# Altium PCB New_Bottom_Board.PcbDoc (part 1 of 2)
Units mm, origin at the board's own origin, x right, y up, seen from the top; angles counter-clockwise.
Board outline 85 x 66 mm, 2 copper layers (Top Layer, Bottom Layer); 47 components, 65 nets, 232 pads, 144 vias.
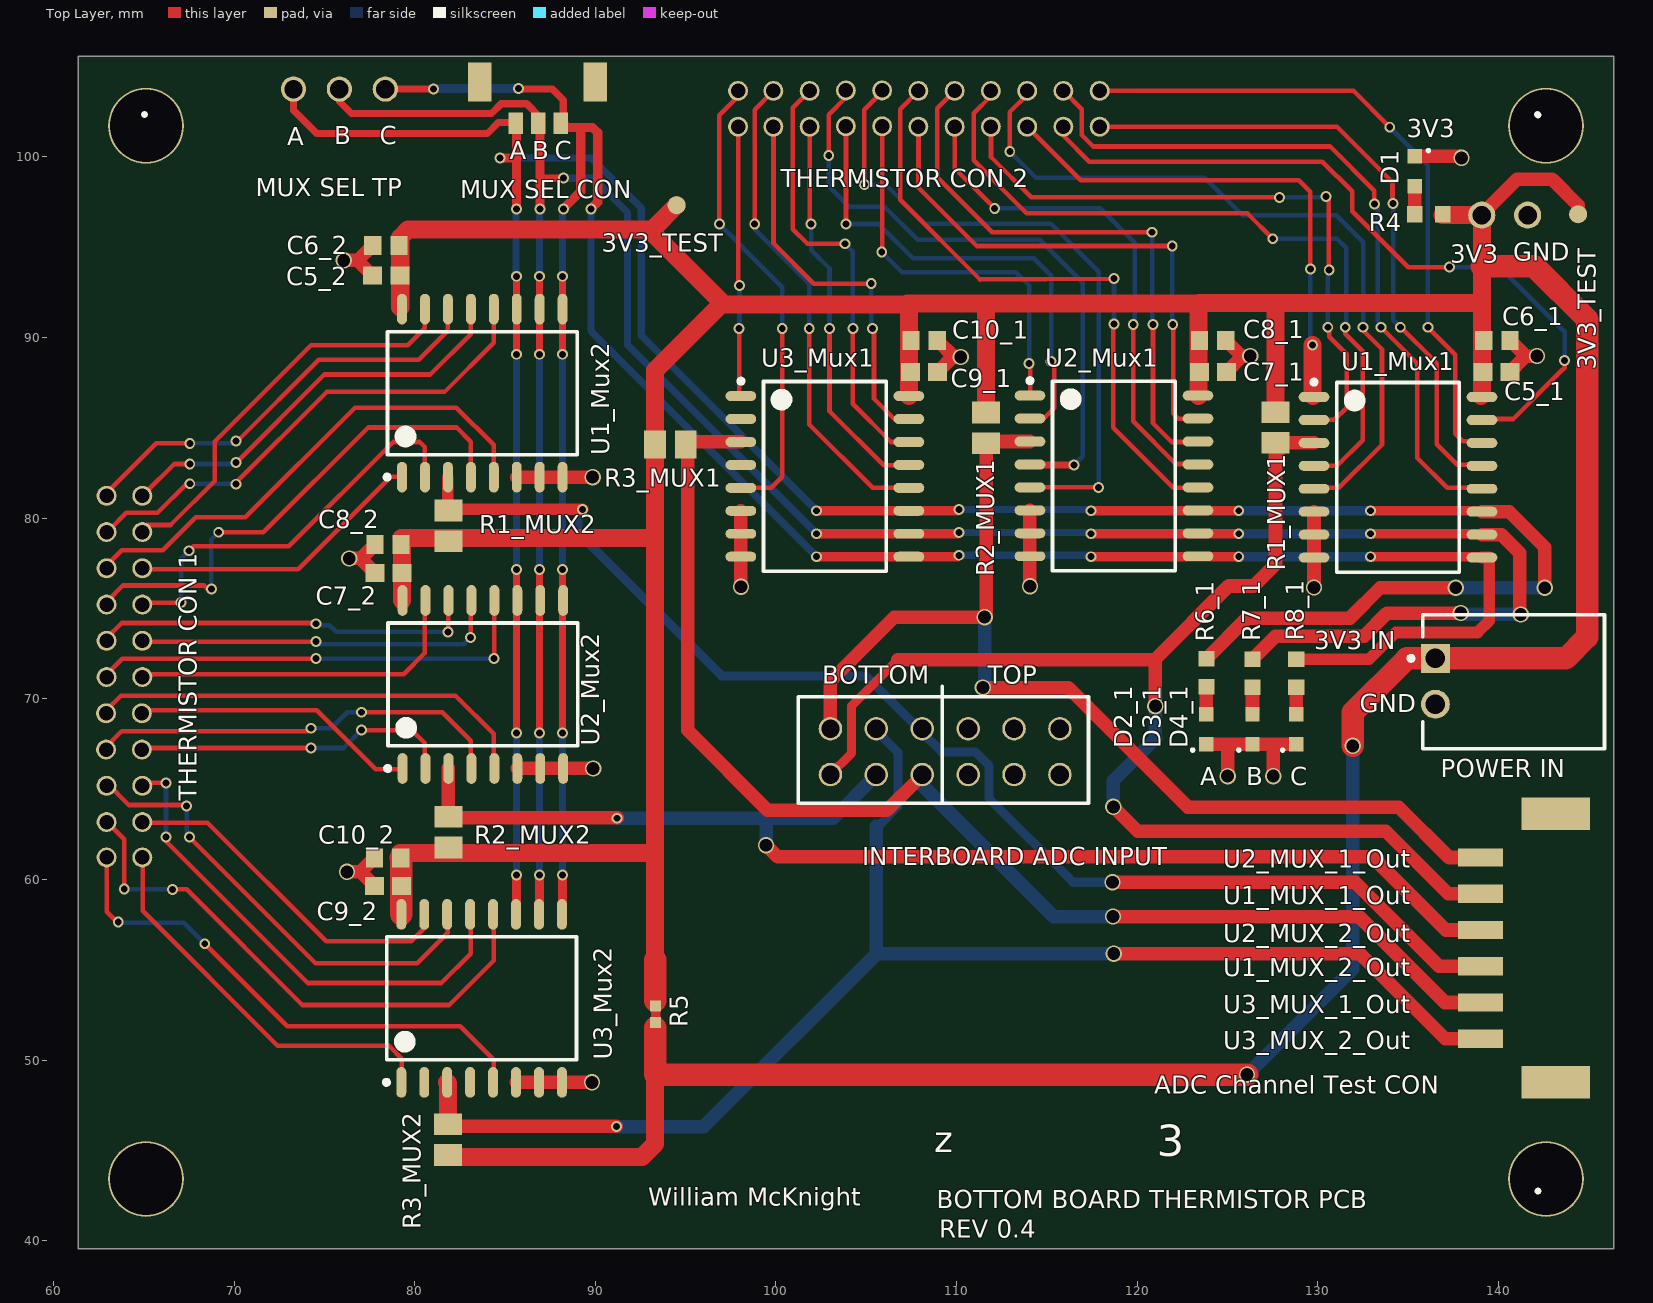
[diagram p0: Top Layer view]
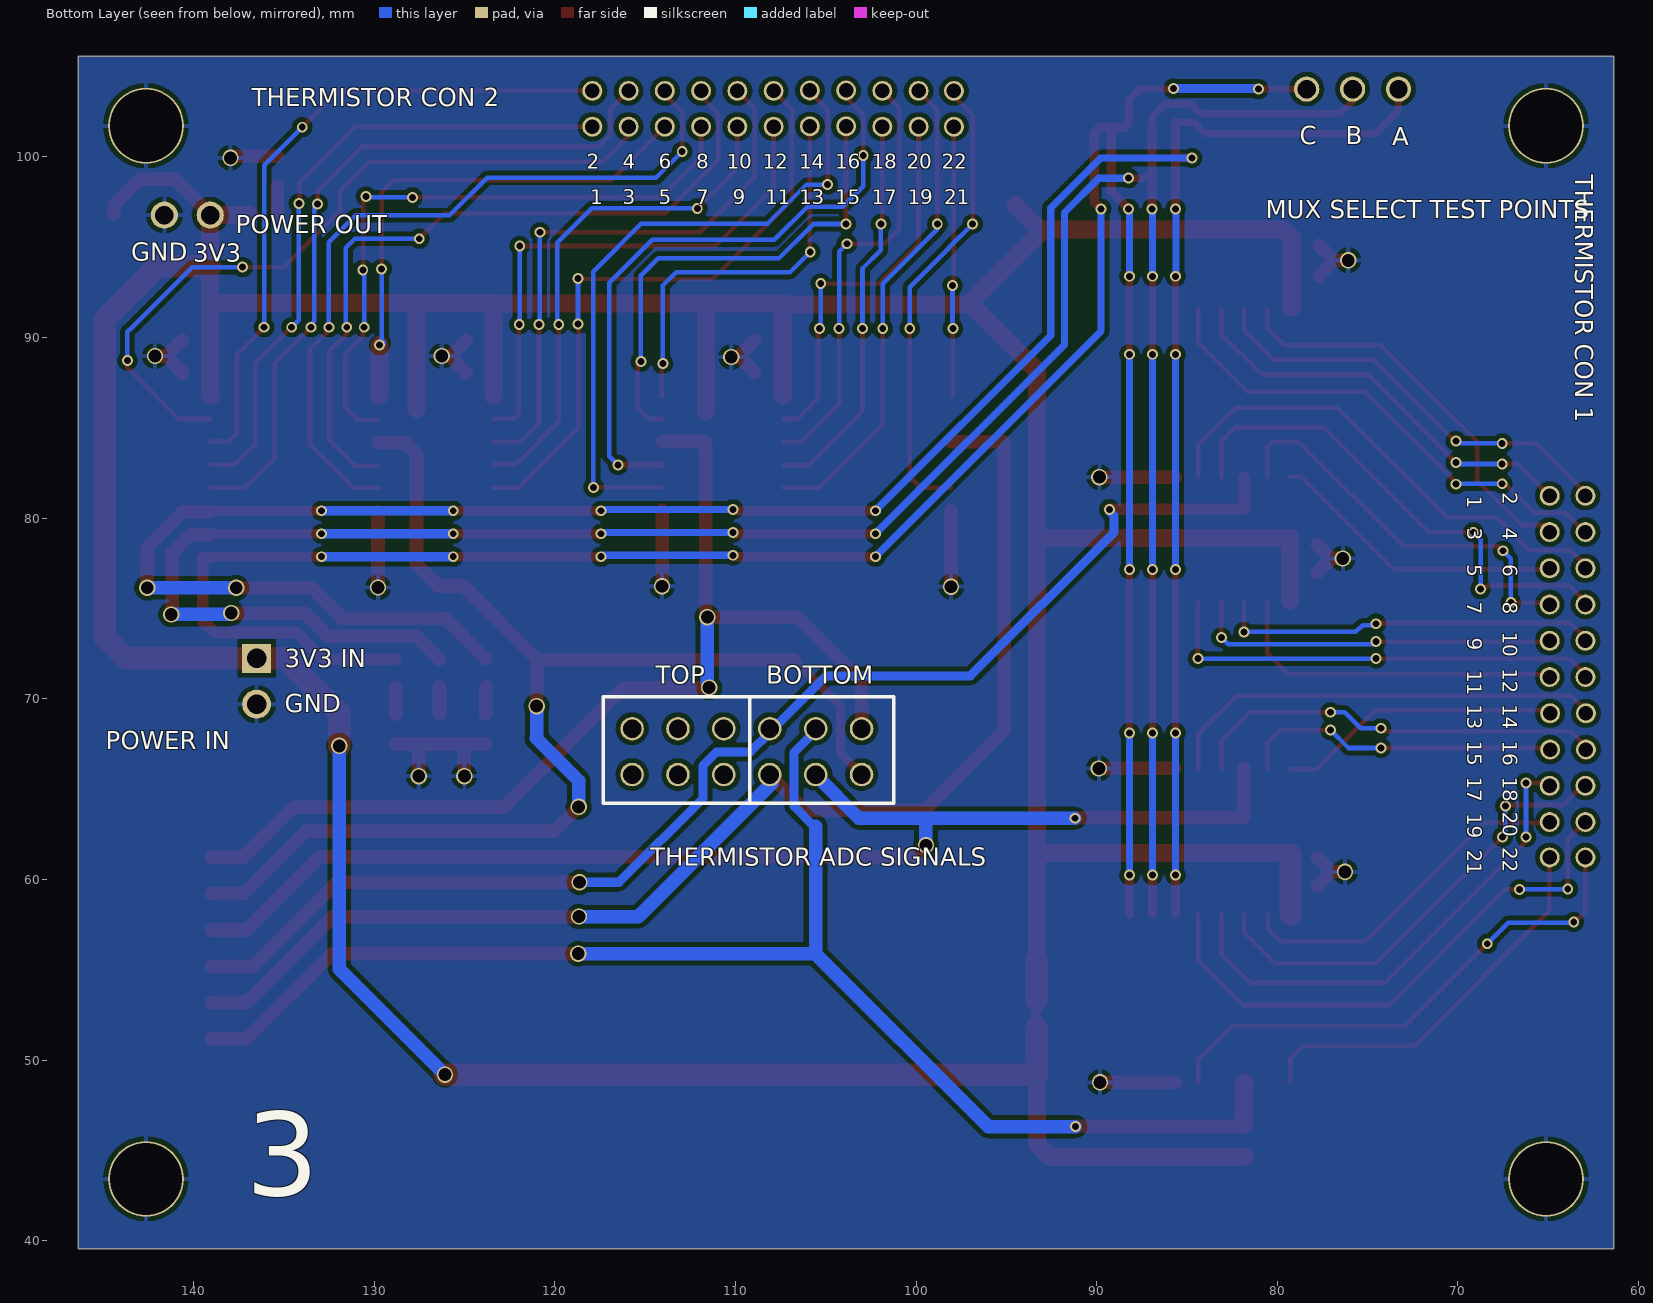
[diagram p1: Bottom Layer view, seen from below]
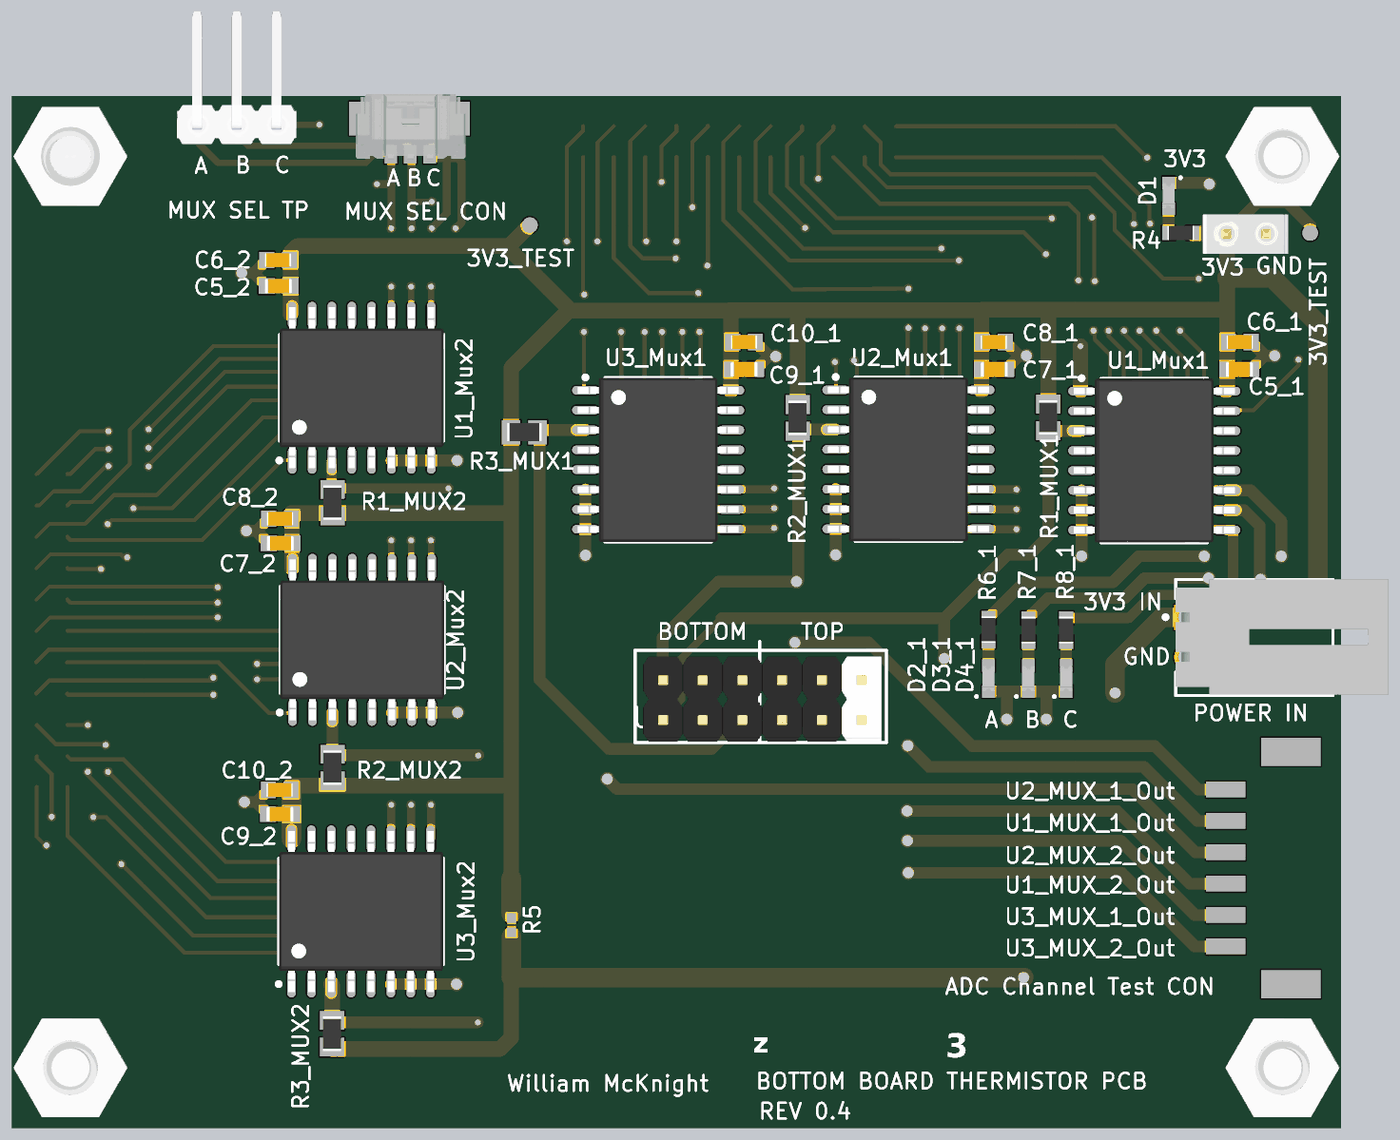
[diagram p2: 3D render of the assembled board from above, using the file's embedded part models]

## Layer stack, top to bottom
Top Solder: solder mask 0.0102, Solder Resist, Dk 3.5
Top Layer: signal copper 0.0356
Dielectric 1: dielectric 0.32, FR-4, Dk 4.8
Bottom Layer: signal copper 0.0356
Bottom Solder: solder mask 0.0102, Solder Resist, Dk 3.5

## Board outline
61.375,39.575 61.375,105.575 146.375,105.575 146.375,39.575

## Design rules (kind name [scope] priority, off if disabled: settings)
Clearance [All] p1: gap=0.254 ignorepadtopadclearanceinfootprint=FALSE except(0: Arc-Hole Track-Hole SMDPad-Hole THPad-Hole Via-Hole Fill-Hole Poly-Hole Region-Hole Text-Hole; 0.127: Arc-Arc Arc-Track Arc-Via Track-Track Track-Via)
HoleSize [All] p1: absolutevalues=TRUE maxlimit=2.54 minlimit=0.3 maxpercent=80.000 minpercent=20.000
MinimumAnnularRing [All] p1: minimumring=0.3
PolygonConnect [All] p1: connectstyle=Relief reliefconductorwidth=0.254 reliefentries=4 polygonreliefangle="90 Angle" airgapwidth=0.254
RoutingVias [All] p1: holewidth=0.381 width=0.65 viastyle="Through Hole" minholewidth=0.305 minwidth=0.6 maxholewidth=0.711 maxwidth=0.9
ShortCircuit [All] p1: allowed=TRUE
SolderMaskExpansion [All] p1: expansion=0.102
Width [All] p1: maxlimit=5.08 minlimit=0.127 preferedwidth=0.381 minimp=50.000000 maximp=50.000000 favimp=50.000000
28 further rules are at their usual default settings.

## Classes and differential pairs
component class Data_TransferA_U_AHK50H-ND_THERM_CONNECTOR1: "Thermistor CON 2"
component class Data_TransferA_U_Single_Mux1: C5_1 C6_1 C7_1 C8_1 C9_1 C10_1 R1_MUX1 R2_MUX1 R3_MUX1 U1_Mux1 U2_Mux1 U3_Mux1
component class Data_TransferB_U_AHK50H-ND_THERM_CONNECTOR2: "Thermistor CON 1"
component class Data_TransferB_U_Single_Mux2: 3V3_TEST C5_2 C6_2 C7_2 C8_2 C9_2 C10_2 "MUX SEL CON" R1_MUX2 R2_MUX2 U1_Mux2 U2_Mux2 U3_Mux2
component class U_Data_Conversion: 3V3 3V3_TEST "ADC Channel Test CON" D1 "Power IN" R4
net class ADC_OUTA[1..2]: ADC_OUTA1 ADC_OUTA2
net class ADC_OUTB[1..2]: ADC_OUTB1 ADC_OUTB2
net class ADC_OUTC[1..2]: ADC_OUTC1 ADC_OUTC2
channel class 50Pin_Connector: Data_TransferA_U_AHK50H-ND_THERM_CONNECTOR1 Data_TransferB_U_AHK50H-ND_THERM_CONNECTOR2
channel class MID: Data_TransferA Data_TransferB
channel class Multiplexers: Data_TransferA_U_Single_Mux1 Data_TransferB_U_Single_Mux2

## Components (designator, comment, footprint, x,y, rotation, side; value= is the part's Value field where it differs from the comment)
3V3 "2 Pos Power Header" "2 POS POWER HEADER" 139.068,96.778 r0 top
3V3_TEST "Test Point" "TEST POINT" 144.4,96.825 r90 top
3V3_TEST "Test Point" "TEST POINT" 94.5,97.325 r90 top
"ADC Channel Test CON" "6Pos_ADC_Volt_Test_Connector" 6POS_ADC_VOLT_TEST 139,51.187 r90 top
C5_1 "0.1uF" "0.1UF BYPASS CAPACITOR" 139.875,88.1 r180 top (schematic designator C5)
C5_2 "0.1uF" "0.1UF BYPASS CAPACITOR" 78.425,93.425 r0 top (schematic designator C5)
C6_1 "1uF" 1UF_SAMSUNG 139.9,89.85 r180 top (schematic designator C6)
C6_2 "1uF" 1UF_SAMSUNG 78.4,95.1 r0 top (schematic designator C6)
C7_1 "0.1uF" "0.1UF BYPASS CAPACITOR" 124.2,88.1 r180 top (schematic designator C7)
C7_2 "0.1uF" "0.1UF BYPASS CAPACITOR" 78.55,76.975 r0 top (schematic designator C7)
C8_1 "1uF" 1UF_SAMSUNG 124.175,89.85 r180 top (schematic designator C8)
C8_2 "1uF" 1UF_SAMSUNG 78.525,78.55 r0 top (schematic designator C8)
C9_1 "0.1uF" "0.1UF BYPASS CAPACITOR" 108.2,88.1 r180 top (schematic designator C9)
C9_2 "0.1uF" "0.1UF BYPASS CAPACITOR" 78.525,59.65 r0 top (schematic designator C9)
C10_1 "1uF" 1UF_SAMSUNG 108.2,89.85 r180 top (schematic designator C10)
C10_2 "1uF" 1UF_SAMSUNG 78.5,61.2 r0 top (schematic designator C10)
D1 "LED" GREEN_SMD_LED 136.976,108.813 r270 top
D2_1 "LED" GREEN_SMD_LED 122.199,58.712 r90 top (schematic designator D2)
D3_1 "LED" GREEN_SMD_LED 124.749,58.712 r90 top (schematic designator D3)
D4_1 "LED" GREEN_SMD_LED 127.174,58.712 r90 top (schematic designator D4)
"INTERBOARD ADC INPUT" "12 POS ADC Header" "12 POS DUAL HEADER" 103.015,65.812 r0 top
"MUX SEL CON" "3_POS_MEX_SEL" 3POS_MUX_SEL 88.095,101.864 r180 top
"MUX SEL TP" "3 POS Mux Select Header" "MUX SELECT 3 POS HEADER PIN" 78.373,103.754 r180 top (schematic designator P5)
"POWER IN" "2Pos Power Connector" "2POS POWER CONNECTOR" 136.475,70.95 r90 top
R1_MUX1 "6.49kOhm SMD Resistor" RESC2012X06N 127.65,85.025 r90 top
R1_MUX2 "6.49kOhm SMD Resistor" RESC2012X06N 81.875,79.575 r270 top
R2_MUX1 "6.49kOhm SMD Resistor" RESC2012X06N 111.625,85 r90 top
R2_MUX2 "6.49kOhm SMD Resistor" RESC2012X06N 81.875,62.625 r270 top
R3_MUX1 "6.49kOhm SMD Resistor" RESC2012X06N 94.15,84.075 r180 top
R3_MUX2 "6.49kOhm SMD Resistor" RESC2012X06N 81.85,45.6 r270 top
R4 "Green" GREEN_LED_RESISTOR_90.9 136.125,96.825 r0 top
R5 "Top Layer 0hm Resistor" "Top Layer 0ohm Resistor" 93.325,52.086 r90 top
R6_1 "Green_LED_Res" GREEN_LED_RESISTOR_90.9 123.825,71.45 r270 top (schematic designator R6)
R7_1 "Green_LED_Res" GREEN_LED_RESISTOR_90.9 126.375,71.425 r270 top (schematic designator R7)
R8_1 "Green_LED_Res" GREEN_LED_RESISTOR_90.9 128.8,71.425 r270 top (schematic designator R8)
"THERMISTOR CON 1" "22-Pin-Connector" ? 407.419,411.872 r90 top
"THERMISTOR CON 2" "22-Pin-Connector" ? 448.547,-240.819 r0 top
U1_Mux1 "8:1 - MUX" "8X1 16SOIC MUX" 134.431,82.266 r0 top
U1_Mux2 "8:1 - MUX" "8X1 16SOIC MUX" 83.745,86.925 r90 top
U2_Mux1 "8:1 - MUX" "8X1 16SOIC MUX" 118.709,82.342 r0 top
U2_Mux2 "8:1 - MUX" "8X1 16SOIC MUX" 83.775,70.8 r90 top
U3_Mux1 "8:1 - MUX" "8X1 16SOIC MUX" 102.707,82.317 r0 top
U3_Mux2 "8:1 - MUX" "8X1 16SOIC MUX" 83.705,53.425 r90 top
? "#6-32 Female-Male Standoff" "#6-32 Female-Male Standoff" 65.125,101.825 r180 top
? "#6-32 Female-Male Standoff" "#6-32 Female-Male Standoff" 142.625,101.621 r0 top
? "#6-32 Female-Male Standoff" "#6-32 Female-Male Standoff" 65.125,43.325 r0 top
? "#6-32 Female-Male Standoff" "#6-32 Female-Male Standoff" 142.625,43.325 r0 top

## Footprints (in the part's own frame and the unit in brackets; to place one, negate y for a bottom-side part, rotate by r counter-clockwise, add the part's x,y. Pads: shape width x height; smd on the part's side, far side on the other; paste and mask are expansions set on the pad)
"0.1UF BYPASS CAPACITOR" [mm] "Chip Capacitor, 2-Leads, Body 1.60x0.80mm, IPC Medium Density"
  rect 1.05x1 smd: 1(-0.75,0) 2(0.75,0)
  body extent -0.87,-0.48 0.87,0.48, height 0.9
1UF_SAMSUNG [mm]
  rect 0.95x1.05 smd: 1(-0.725,0) 2(0.725,0)
  body extent -0.85,-0.45 0.85,0.45, height 0.9
"2 POS POWER HEADER" [mm] "Connecting Power between boards"
  round 1.5 hole 1.02: 1(0,0) 2(2.54,0)
  body extent -1.54,-1.3 3.92,1.24, height 10.04
"2POS POWER CONNECTOR" [mm]
  rect 1.6x1.6 hole 1.09: 1(1.295,-0.025)
  round 1.6 hole 1.09: 2(-1.245,-0.025)
  silkscreen extent -3.71,-9.38 3.71,1.45, body extent -3.66,-12.91 3.71,0.67, height 6.98
3POS_MUX_SEL [mm] "CONN HEADER SMD R/A 3POS 1.25MM"
  rect 0.8x1.2 smd: 1(0,0) 2(1.245,0) 3(2.489,0)
  rect 1.3x2.15 smd: 4(-1.905,-2.286) 5(4.496,-2.286)
  body extent -2.28,-3.84 4.72,0.36, height 3.91
6POS_ADC_VOLT_TEST [mm] "CONN HEADER SMD R/A 6POS 2MM"
  rect 1x2.5 smd: 1(0,0) 2(2.007,0) 3(4.013,0) 4(6.02,0) 5(8.026,0) 6(10.033,0)
  rect 1.8x3.8 smd: 7(-2.413,-4.166) 8(12.446,-4.166)
"8X1 16SOIC MUX" [mm] "IC MUX/DEMUX 8X1 16SOIC"
  oval 1.7x0.55 smd: 1(-4.65,4.445) 2(-4.65,3.175) 3(-4.65,1.905) 4(-4.65,0.635) 5(-4.65,-0.635) 6(-4.65,-1.905) 7(-4.65,-3.175) 8(-4.65,-4.445) 9(4.65,-4.445) 10(4.65,-3.175) 11(4.65,-1.905) 12(4.65,-0.635) 13(4.65,0.635) 14(4.65,1.905) 15(4.65,3.175) 16(4.65,4.445)
  silkscreen extent -4.77,-5.25 3.4,5.39, body extent -5.15,-5.25 5.15,5.25, height 2.65
"12 POS DUAL HEADER" [mm] "Board to Board ADC Channel Header"
  round 1.3 hole 1.02: 1(0,0) 2(0,2.54) 3(2.54,0) 4(2.54,2.54) 5(5.08,0) 6(5.08,2.54) 7(7.62,0) 8(7.62,2.54) 9(10.16,0) 10(10.16,2.54) 11(12.7,0) 12(12.7,2.54)
  body extent -1.27,-1.54 13.97,3.92, height 20.29
"#6-32 Female-Male Standoff" [mm] "Hex Standoff Threaded #6-32 Aluminum 0.375\" (9.53mm) 3/8\""
  round 4.2 hole 4: 1(0,0.102)
  body extent -3.66,-3.07 3.66,3.28, height 15.85
GREEN_LED_RESISTOR_90.9 [mm]
  rect 0.85x0.9 smd: 1(-0.775,0) 2(0.775,0)
  body extent -0.85,-0.45 0.85,0.45, height 0.55
GREEN_SMD_LED [mm]
  rect 0.8x0.8 smd: 1(8.788,-1.626) 2(10.439,-1.626)
  silkscreen extent 8.43,-0.89 8.48,-0.84, body extent 8.79,-2.02 10.41,-1.23, height 0.71
"MUX SELECT 3 POS HEADER PIN" [mm]
  round 1.4 hole 1.02: 1(0,0) 2(2.54,0) 3(5.08,0)
  body extent -1.19,-7.26 6.43,1.24, height 5.77
RESC2012X06N [mm] "Chip Resistor, 2-Leads, Body 2.00x1.25mm, IPC Medium Density"
  rect 1.2x1.55 smd: 1(-0.85,0) 2(0.85,0)
  body extent -1.1,-0.58 1.1,0.58, height 0.6
"TEST POINT" [mm]
  round 1 smd: 1(0,0)
"Top Layer 0ohm Resistor" [mm]
  rect 0.6x0.6 smd: 1(0,0) 2(0.914,0)
  Top Layer region: 0.254,-0.279 0.66,-0.279 0.66,0.254 0.254,0.254
? [mm]
  round 1.1 hole 0.8: 1(-330.632,342.494) 2(-330.632,344.475) 3(-332.638,342.494) 4(-332.638,344.475) 5(-334.645,342.494) 6(-334.645,344.475) 7(-336.652,342.494) 8(-336.652,344.475) 9(-338.658,342.494) 10(-338.658,344.475) 11(-340.665,342.494) 12(-340.665,344.475) 13(-342.671,342.519) 14(-342.671,344.5) 15(-344.678,342.519) 16(-344.678,344.5) 17(-346.685,342.494) 18(-346.685,344.475) 19(-348.691,342.494) 20(-348.691,344.475) 21(-350.647,342.494) 22(-350.647,344.475)
  body extent -352.64,342.19 -328.64,352.19, height 5.06

## Part data
3V3: Color=Black, Current Rating=2.5A, Manufacturer=3M, Manufacturer Part Number=929715-06-01-EU, Max Operating Temperature=105°C, Min Operating Temperature=-40°C, Package Quantity=1000, Supplier Part Number 1=3M156375-02-ND, ComponentLink1Description=https://datasheet.ciiva.com/5147/ts0769-35914-5147696.pdf?src-supplier=Mouser, ComponentLink1URL=https://datasheet.ciiva.com/5147/ts0769-35914-5147696.pdf?src-supplier=Mouser, ComponentLink2Description=https://datasheet.ciiva.com/6818/ts0769-6818155.pdf?src-supplier=Digi-Key, ComponentLink2URL=https://datasheet.ciiva.com/6818/ts0769-6818155.pdf?src-supplier=Digi-Key, Connector Type="Male Pin", Contact Gender=Male, Contact Material="Copper Alloy", Contact Mating Length=0.318inch, Contact Plating=Gold, Gender=Male, Housing Material=Polycyclohexylenedimethylene, Mount="Through Hole", Number of Positions=2, Number of Rows=2, Packaging=Bulk, Pitch=2.54mm, Pricing 1="1=0.43000, 10=0.40200, 25=0.34480, 50=0.29300, 100=0.28160, 250=0.25284, 500=0.24136 (USD)", RoHS=Yes, Row Spacing=0.1inch, Stock 1=0, Supplier 1=Digi-Key, Termination=Solder
"ADC Channel Test CON": "Connector Header Surface Mount, Right Angle 6 position 0.079\" (2.00mm)", Manufacturer=Molex, Manufacturer Part Number=5055780671, Supplier Part Number 1=WM17945CT-ND, Pricing 1="1=1.02000, 10=0.89300, 100=0.77050 (USD)", RoHS=No, Stock 1=3435, Supplier 1=Digi-Key
C5_1 C5_2 C7_1 C7_2 C9_1 C9_2: library part "0.1uF Cap", "0.1uF Bypass Cap", Case/Package=0603, Case Code (Metric)=1608, Dielectric=X7R, Dielectric Material=Ceramic, Manufacturer=KEMET, Manufacturer Part Number=C0603C104K9RACTU, Max Operating Temperature=125°C, Min Operating Temperature=-55°C, Package Quantity=4000, Supplier Part Number 1=399-15351-1-ND, Tolerance=10%, Voltage Rating=6.3V, Case Code (Imperial)=0603, ComponentLink1Description=https://datasheet.ciiva.com/13371/kem-c1002-x7r-smd-357932-13371879.pdf?src-supplier=Mouser, ComponentLink1URL=https://datasheet.ciiva.com/13371/kem-c1002-x7r-smd-357932-13371879.pdf?src-supplier=Mouser, Dissipation Factor=5%, Height=0.8mm, Length=1.6mm, Mount="Surface Mount", Packaging="Tape and Reel", Pricing 1="1=0.19000, 10=0.13800, 100=0.06480, 500=0.04546, 1000=0.03763 (USD)", RoHS=Yes, Stock 1=758, Supplier 1=Digi-Key, Termination=SMD/SMT, Thickness=0.034inch, Voltage Rating (DC)=6.3V, Width=0.8mm
C6_1 C6_2 C8_1 C8_2 C10_1 C10_2: library part "1uF Samsung Cap", "1uF Samsung Cap", Case/Package=0603, Case Code (Metric)=1608, Dielectric=X7R, Manufacturer=Samsung, Manufacturer Part Number=CL10B105KP8NNNC, Max Operating Temperature=125°C, Min Operating Temperature=-55°C, Package Quantity=1, Supplier Part Number 1=1276-1946-1-ND, Tolerance=10%, Voltage Rating=10V, Capacitance=1uF, Case Code (Imperial)=0603, ComponentLink1Description=https://media.digikey.com/pdf/Data%20Sheets/Samsung%20PDFs/CL_Series_MLCC_ds.pdf?src-supplier=Digi-Key, ComponentLink1URL=https://media.digikey.com/pdf/Data%20Sheets/Samsung%20PDFs/CL_Series_MLCC_ds.pdf?src-supplier=Digi-Key, ComponentLink2Description=http://www1.futureelectronics.com/doc/SAMSUNG/CL10B105KP8NNNC.pdf?src-supplier=Future+Electronics, ComponentLink2URL=http://www1.futureelectronics.com/doc/SAMSUNG/CL10B105KP8NNNC.pdf?src-supplier=Future+Electronics, ComponentLink3Description=https://www.verical.com/server-webapp/html/getDatasheet?partID=358410&src-supplier=Verical, ComponentLink3URL=https://www.verical.com/server-webapp/html/getDatasheet?partID=358410&src-supplier=Verical, Contact Plating=Tin, Depth=0.8mm, Height=0.8mm, Lead Free="Lead Free", Length=1.6mm, Mount="Surface Mount", Packaging="Tape and Reel", Pricing 1="1=0.1, 10=0.052, 100=0.0233, 500=0.0166, 1000=0.0131 (USD)", Radiation Hardening=No, Stock 1=10781730, Supplier 1=Digi-Key, Thickness=0.035inch, Voltage Rating (DC)=10V, Width=0.031inch
D1 D2_1 D3_1 D4_1: library part GREEN_LED, Case/Package=0603, Case Code (Metric)=1608, Color=Green, Forward Current=20mA, Forward Voltage=2V, Lens Color=Colorless,Clear, Manufacturer=Dialight, Manufacturer Part Number=5988070107F, Max Operating Temperature=100°C, Min Operating Temperature=-30°C, Package Quantity=4000, Power Dissipation=60mW, Reverse Voltage=5V, Supplier Part Number 1=350-2035-1-ND, Case Code (Imperial)=0603, ComponentLink1Description=http://www.mouser.com/ds/2/109/SMT_selector_guide-267443.pdf?src-supplier=Mouser, ComponentLink1URL=http://www.mouser.com/ds/2/109/SMT_selector_guide-267443.pdf?src-supplier=Mouser, ComponentLink2Description=http://uk.rs-online.com/webdocs/0ae2/0900766b80ae2975.pdf?src-supplier=RSComponents, ComponentLink2URL=http://uk.rs-online.com/webdocs/0ae2/0900766b80ae2975.pdf?src-supplier=RSComponents, ComponentLink3Description=http://www.farnell.com/datasheets/1720200.pdf?src-supplier=Element14, ComponentLink3URL=http://www.farnell.com/datasheets/1720200.pdf?src-supplier=Element14, ComponentLink4Description=https://media.digikey.com/pdf/Data%20Sheets/Dialight%20PDFs/598_Series_0603_Pkg.pdf?src-supplier=Digi-Key, ComponentLink4URL=https://media.digikey.com/pdf/Data%20Sheets/Dialight%20PDFs/598_Series_0603_Pkg.pdf?src-supplier=Digi-Key, ComponentLink5Description=http://www.farnell.com/datasheets/1484480.pdf?src-supplier=Element14, ComponentLink5URL=http://www.farnell.com/datasheets/1484480.pdf?src-supplier=Element14, ComponentLink6Description=https://www.alliedelec.com/m/d/745256ca487aea7b70ea31e2d673d5bb.pdf?src-supplier=Allied+Electronics, ComponentLink6URL=https://www.alliedelec.com/m/d/745256ca487aea7b70ea31e2d673d5bb.pdf?src-supplier=Allied+Electronics, ComponentLink7Description=http://www.onlinecomponents.com/productFiles/mf-DIA/mdei5980603.pdf?src-supplier=Onlinecomponents.com, ComponentLink7URL=http://www.onlinecomponents.com/productFiles/mf-DIA/mdei5980603.pdf?src-supplier=Onlinecomponents.com, ComponentLink8Description=https://www.verical.com/server-webapp/html/getDatasheet?partID=146438&src-supplier=Verical, ComponentLink8URL=https://www.verical.com/server-webapp/html/getDatasheet?partID=146438&src-supplier=Verical, ComponentLink9Description=http://www.dialight.com/Assets/Brochures_And_Catalogs/Indication/SMT_selector_guide.pdf?src-supplier=Future+Electronics, ComponentLink9URL=http://www.dialight.com/Assets/Brochures_And_Catalogs/Indication/SMT_selector_guide.pdf?src-supplier=Future+Electronics, Depth=0.8mm, Dominant Wavelength=568nm, Height=0.7mm, Illumination Color=Green, Lead Free="Lead Free", Length=1.6mm, Lens Size=0.8mm, Lens Style=Flat,Rectangular,Diffused,Colorless,Clear, Lens Transparency=Clear, Luminous Intensity=20mcd, Mount="Surface Mount", Number of Elements=1, Number of LEDs=1, Number of Pins=2, Packaging="Tape and Reel", Pricing 1="1=0.46, 10=0.33, 25=0.2528, 100=0.1648, 250=0.1209, 500=0.1026, 1000=0.0843 (USD)", Radiation Hardening=No, REACH SVHC="No SVHC", Stock 1=228546, Supplier 1=Digi-Key, Test Current=20mA, Viewing Angle=140°, Wavelength=570nm, Width=0.8mm
"INTERBOARD ADC INPUT": "Interboard connector for thermistors connecting to ADC", Color=Black, Manufacturer=3M, Manufacturer Part Number=929715-06-06-EU, Package Quantity=500, Supplier Part Number 1=3M156375-12-ND, ComponentLink1Description=http://www.mouser.com/ds/2/1/ts0769-35914.pdf?src-supplier=Mouser, ComponentLink1URL=http://www.mouser.com/ds/2/1/ts0769-35914.pdf?src-supplier=Mouser, ComponentLink2Description=http://components.arrow.com/part/dataview/42715320S8912076N3321?src-supplier=Arrow, ComponentLink2URL=http://components.arrow.com/part/dataview/42715320S8912076N3321?src-supplier=Arrow, ComponentLink3Description=http://multimedia.3m.com/mws/mediawebserver?66666UuZjcFSLXTtmXME5x46EVuQEcuZgVs6EVs6E666666--?src-supplier=Digi-Key, ComponentLink3URL=http://multimedia.3m.com/mws/mediawebserver?66666UuZjcFSLXTtmXME5x46EVuQEcuZgVs6EVs6E666666--?src-supplier=Digi-Key, Connector Type="Male Pin", Contact Mating Length=0.318inch, Contact Plating=Gold, Gender=Male, Mount="Through Hole", Number of Positions=12, Number of Rows=2, Packaging=Bulk, Pitch=0.1inch, Pricing 1="1=1.86000, 10=1.69000, 25=1.58600, 50=1.51720, 100=1.44820, 250=1.31024, 500=1.20680 (USD)", RoHS=Yes, Row Spacing=0.1inch, Stock 1=0, Supplier 1=Digi-Key, Termination=Solder
"MUX SEL CON": "Connector Header Surface Mount, Right Angle 3 position 0.049\" (1.25mm)", Flammability Rating="UL94 V-0", Insulation Color=Black, Manufacturer=Molex, Manufacturer Part Number=505567-0371, Max Operating Temperature=105°C, Min Operating Temperature=-40°C, Supplier Part Number 1=WM17039CT-ND, ComponentLink1Description=https://www.molex.com/pdm_docs/sd/5055670371_sd.pdf?src-supplier=Digi-Key, ComponentLink1URL=https://www.molex.com/pdm_docs/sd/5055670371_sd.pdf?src-supplier=Digi-Key, ComponentLink2Description=http://www.farnell.com/datasheets/2551041.pdf?src-supplier=Newark, ComponentLink2URL=http://www.farnell.com/datasheets/2551041.pdf?src-supplier=Newark, Connector Type="Header,Male Pin", Contact Material=Brass, Contact Plating=Tin, Contact Shape=Square, Fastening Type=Ramp, Insulation Material=Nylon, Mount="Surface Mount", Number of Positions=3, Number of Rows=1, Packaging="Cut Tape", Pricing 1="1=0.84000, 10=0.74100, 100=0.63940, 500=0.52312 (USD)", RoHS=No, Stock 1=2041, Supplier 1=Digi-Key, Termination=Solder
"MUX SEL TP": "Mux Sel Header TP", Manufacturer="Adam Equipment", Manufacturer Part Number=PH1RA-03-UA, Supplier Part Number 1=2057-PH1RA-03-UA-ND, ComponentLink1Description=https://datasheet.ciiva.com/16476/page-292-295-16476086.pdf?src-supplier=Future+Electronics, ComponentLink1URL=https://datasheet.ciiva.com/16476/page-292-295-16476086.pdf?src-supplier=Future+Electronics, Lead Free="Lead Free", Pricing 1="1=0.12000, 10=0.11300, 100=0.06960, 500=0.05760, 1000=0.05040, 5000=0.04320, 10000=0.04200 (USD)", RoHS=Yes, Stock 1=4630, Supplier 1=Digi-Key
"POWER IN": "Headers & Wire Housings R/A HDR 2P low profile single", Color=Black, Contact Resistance=30mR, Current Rating=3A, Flammability Rating="UL94 V-0", Insulation Resistance=1GR, Manufacturer=Molex, Manufacturer Part Number=70553-0001, Max Operating Temperature=105°C, Min Operating Temperature=-40°C, Package Quantity=2880, Supplier Part Number 1=WM4900-ND, Voltage Rating=250V, Approvals=UL, ComponentLink1Description=https://datasheet.ciiva.com/5158/0705530001-pcb-headers-172944-5158768.pdf?src-supplier=Mouser, ComponentLink1URL=https://datasheet.ciiva.com/5158/0705530001-pcb-headers-172944-5158768.pdf?src-supplier=Mouser, ComponentLink2Description=https://datasheet.ciiva.com/11746/0900766b80d8d649-11746625.pdf?src-supplier=RSComponents, ComponentLink2URL=https://datasheet.ciiva.com/11746/0900766b80d8d649-11746625.pdf?src-supplier=RSComponents, ComponentLink3Description=https://datasheet.ciiva.com/16657/0705530001-pcb-headers-16657777.pdf?src-supplier=Avnet+Europe, ComponentLink3URL=https://datasheet.ciiva.com/16657/0705530001-pcb-headers-16657777.pdf?src-supplier=Avnet+Europe, ComponentLink4Description=https://datasheet.ciiva.com/7920/ps-70541-7920854.pdf?src-supplier=Element14, ComponentLink4URL=https://datasheet.ciiva.com/7920/ps-70541-7920854.pdf?src-supplier=Element14, ComponentLink5Description=https://datasheet.ciiva.com/30195/179180705530001-pcb-headers-30195548.pdf?src-supplier=Onlinecomponents.com, ComponentLink5URL=https://datasheet.ciiva.com/30195/179180705530001-pcb-headers-30195548.pdf?src-supplier=Onlinecomponents.com, ComponentLink6Description=https://datasheet.ciiva.com/1438/1887076-1438989.pdf?src-supplier=Element14, ComponentLink6URL=https://datasheet.ciiva.com/1438/1887076-1438989.pdf?src-supplier=Element14, ComponentLink7Description=https://datasheet.ciiva.com/10090/0705530001-pcb-headers-10090317.pdf?src-supplier=Avnet, ComponentLink7URL=https://datasheet.ciiva.com/10090/0705530001-pcb-headers-10090317.pdf?src-supplier=Avnet, Contact Material=Bronze, Contact Plating=Gold, ELV=Compliant, Gender=Male, Glow Wire Compliant=Non-compliant, Housing Color=Black, Housing Material=Thermoplastic, Lead Free="Lead Free", Material=Brass, Mount="Through Hole", Number of Circuits=2, Number of Contacts=2, Number of Positions=2, Number of Rows=1, Orientation="Right Angle", Packaging=Rail/Tube, Pitch=2.54mm, Pricing 1="1=0.71000, 72=0.53486, 144=0.51264, 504=0.44575, 1008=0.36775, 5040=0.32318, 10008=0.30089 (USD)", Radiation Hardening=No, REACH SVHC=Unknown, RoHS=Yes, Stock 1=8671, Supplier 1=Digi-Key, Termination="Through Hole", Voltage Rating (DC)=250V
R1_MUX1 R1_MUX2 R2_MUX1 R2_MUX2 R3_MUX1 R3_MUX2: Case/Package=0805, Case Code (Metric)=2012, Manufacturer=Panasonic, Manufacturer Part Number=ERA6AEB6491V, Max Operating Temperature=155°C, Max Power Dissipation=125mW, Min Operating Temperature=-55°C, Package Quantity=1, Resistance=6.49K, Supplier Part Number 1=P6.49KDACT-ND, Temperature Coefficient=25ppm/°C, Tolerance=0.1%, Voltage Rating=100V, Case Code (Imperial)=0805, ComponentLink1Description=http://www.farnell.com/datasheets/485442.pdf?src-supplier=Farnell, ComponentLink1URL=http://www.farnell.com/datasheets/485442.pdf?src-supplier=Farnell, ComponentLink2Description=http://www.mouser.com/ds/2/315/AOA0000CE26-32660.pdf?src-supplier=Mouser, ComponentLink2URL=http://www.mouser.com/ds/2/315/AOA0000CE26-32660.pdf?src-supplier=Mouser, ComponentLink3Description=http://www.farnell.com/datasheets/2059650.pdf?src-supplier=Farnell, ComponentLink3URL=http://www.farnell.com/datasheets/2059650.pdf?src-supplier=Farnell, ComponentLink4Description=http://uk.rs-online.com/webdocs/0eb1/0900766b80eb1d8c.pdf?src-supplier=RSComponents, ComponentLink4URL=http://uk.rs-online.com/webdocs/0eb1/0900766b80eb1d8c.pdf?src-supplier=RSComponents, ComponentLink5Description=http://www.farnell.com/datasheets/485442.pdf?src-supplier=Element14, ComponentLink5URL=http://www.farnell.com/datasheets/485442.pdf?src-supplier=Element14, ComponentLink6Description=http://www.produktinfo.conrad.com/datenblaetter/1100000-1199999/001181295-da-01-en-WIDERSTAND_ERA_0805_6K49_0_1__5000ST.pdf?src-supplier=Conrad, ComponentLink6URL=http://www.produktinfo.conrad.com/datenblaetter/1100000-1199999/001181295-da-01-en-WIDERSTAND_ERA_0805_6K49_0_1__5000ST.pdf?src-supplier=Conrad, Composition="Thin Film,Metal Film", Contact Plating=Tin, Depth=1.25mm, Features="Automotive AEC-Q200", Height=0.5mm, Lead Free="Lead Free", Length=2mm, Military Standard=Not, Mount="Surface Mount", Number of Pins=2, Number of Terminations=2, Packaging="Tape and Reel", Power Rating=125mW, Pricing 1="1=0.36, 10=0.302, 100=0.1182, 1000=0.0495, 2500=0.0454 (USD)", Radiation Hardening=No, REACH SVHC="No SVHC", Stock 1=15147, Supplier 1=Digi-Key, Termination=SMD/SMT, Voltage Rating (DC)=100V, Width=1.25mm
R4: library part Green_LED_Res, Case/Package=0201, Case Code (Metric)=0603, Manufacturer=Panasonic, Manufacturer Part Number=ERJ-1GNF90R9C, Max Operating Temperature=125°C, Max Power Dissipation=50mW, Min Operating Temperature=-55°C, Package Quantity=15000, Resistance=90.9R, Supplier Part Number 1=311-90.9HRCT-ND, Temperature Coefficient=200ppm/°C, Tolerance=1%, Voltage Rating=25V, Voltage Rating (DC)=50V, Case Code (Imperial)=0201, ComponentLink1Description=https://datasheet.ciiva.com/15189/getdatasheetpartid-326528-15189836.pdf?src-supplier=Verical, ComponentLink1URL=https://datasheet.ciiva.com/15189/getdatasheetpartid-326528-15189836.pdf?src-supplier=Verical, ComponentLink2Description=https://datasheet.ciiva.com/12558/rc0603-272842-12558285.pdf?src-supplier=Mouser, ComponentLink2URL=https://datasheet.ciiva.com/12558/rc0603-272842-12558285.pdf?src-supplier=Mouser, Composition="Thick Film", Contact Plating=Tin,Matte, Depth=0.8mm, Height=0.01inch, Lead Free="Lead Free", Length=0.024inch, Military Standard=Not, Mount="Surface Mount", Number of Terminations=2, Packaging="Tape and Reel", Power Rating=50mW, Pricing 1="1=0.10000, 10=0.02400, 100=0.00970, 1000=0.00437, 2500=0.00379 (USD)", Radiation Hardening=No, RoHS=Yes, Stock 1=401780, Supplier 1=Digi-Key, Termination=SMD/SMT, Width=0.3mm
R6_1 R7_1 R8_1: Case/Package=0201, Case Code (Metric)=0603, Manufacturer=Panasonic, Manufacturer Part Number=ERJ-1GNF90R9C, Max Operating Temperature=125°C, Max Power Dissipation=50mW, Min Operating Temperature=-55°C, Package Quantity=15000, Resistance=90.9R, Supplier Part Number 1=311-90.9HRCT-ND, Temperature Coefficient=200ppm/°C, Tolerance=1%, Voltage Rating=25V, Voltage Rating (DC)=50V, Case Code (Imperial)=0201, ComponentLink1Description=https://datasheet.ciiva.com/15189/getdatasheetpartid-326528-15189836.pdf?src-supplier=Verical, ComponentLink1URL=https://datasheet.ciiva.com/15189/getdatasheetpartid-326528-15189836.pdf?src-supplier=Verical, ComponentLink2Description=https://datasheet.ciiva.com/12558/rc0603-272842-12558285.pdf?src-supplier=Mouser, ComponentLink2URL=https://datasheet.ciiva.com/12558/rc0603-272842-12558285.pdf?src-supplier=Mouser, Composition="Thick Film", Contact Plating=Tin,Matte, Depth=0.8mm, Height=0.01inch, Lead Free="Lead Free", Length=0.024inch, Military Standard=Not, Mount="Surface Mount", Number of Terminations=2, Packaging="Tape and Reel", Power Rating=50mW, Pricing 1="1=0.10000, 10=0.02400, 100=0.00970, 1000=0.00437, 2500=0.00379 (USD)", Radiation Hardening=No, RoHS=Yes, Stock 1=401780, Supplier 1=Digi-Key, Termination=SMD/SMT, Width=0.3mm
"THERMISTOR CON 1" "THERMISTOR CON 2": "Current Therm Connector", Color=Black, Contact Resistance=30mR, Current Rating=2A, Manufacturer=Hirose, Manufacturer Part Number=DF11-22DP-2DS(24), Max Operating Temperature=85°C, Min Operating Temperature=-30°C, Package Quantity=20, Supplier Part Number 1=H10253-ND, Voltage Rating=250V, ComponentLink1Description=http://docs-usa.electrocomponents.com/techlib:/itc_doclist_US.htm?stockno=6888963&src-supplier=Allied+Electronics, ComponentLink1URL=http://docs-usa.electrocomponents.com/techlib:/itc_doclist_US.htm?stockno=6888963&src-supplier=Allied+Electronics, ComponentLink2Description=https://www.verical.com/server-webapp/html/getDatasheet?partID=456315&src-supplier=Verical, ComponentLink2URL=https://www.verical.com/server-webapp/html/getDatasheet?partID=456315&src-supplier=Verical, ComponentLink3Description=http://www.hirose.co.jp/cataloge_hp/en_DF11_20130411.pdf?src-supplier=Future+Electronics, ComponentLink3URL=http://www.hirose.co.jp/cataloge_hp/en_DF11_20130411.pdf?src-supplier=Future+Electronics, ComponentLink4Description=http://www.farnell.com/datasheets/91550.pdf?src-supplier=Element14, ComponentLink4URL=http://www.farnell.com/datasheets/91550.pdf?src-supplier=Element14, ComponentLink5Description=http://www.mouser.com/ds/2/185/DF11_catalog-1064296.pdf?src-supplier=Mouser, ComponentLink5URL=http://www.mouser.com/ds/2/185/DF11_catalog-1064296.pdf?src-supplier=Mouser, ComponentLink6Description=http://documents.rs-components.com/techlib://itc_doclist_GB.htm?stockno=6056598&src-supplier=RSComponents, ComponentLink6URL=http://documents.rs-components.com/techlib://itc_doclist_GB.htm?stockno=6056598&src-supplier=RSComponents, Connector Type="Male Pin", Contact Material="Brass,Copper Alloy,Tin", Contact Mating Length=0.118inch, Contact Plating=Tin, Depth=10mm, Fastening Type=Detent, Gender=Male, Height=5mm, Housing Color=Black, Housing Material=Polyamide, Lead Free="Lead Free", Length=24mm, Max Current Rating=2A, Mount="Through Hole", Number of Contacts=22, Number of Positions=22, Number of Rows=2, Orientation="Right Angle", Packaging=Rail/Tube, Pitch=2mm, Pricing 1="1=1.19, 20=1.0455, 100=0.902, 500=0.738, 1000=0.656 (USD)", Radiation Hardening=No, Row Spacing=0.079inch, Stock 1=536, Supplier 1=Digi-Key, System=Connector, Termination=Solder
U1_Mux1 U1_Mux2 U2_Mux1 U2_Mux2 U3_Mux1 U3_Mux2: "Current Therm 8:1 Mux", Case/Package=TSSOP, High Level Output Current=25mA, Manufacturer="Texas Instruments", Manufacturer Part Number=SN74LV4051ATPWRQ1, Max Operating Temperature=105°C, Max Supply Voltage=5.5V, Min Operating Temperature=-40°C, Min Supply Voltage=2V, On-State Resistance=75R, Operating Supply Current=20uA, Package Quantity=1, Supplier Part Number 1=296-37427-1-ND, -3db Bandwidth=35MHz, Bandwidth=35MHz, ComponentLink1Description=http://www.ti.com/lit/ds/symlink/sn74lv4051a-q1.pdf?src-supplier=Digi-Key, ComponentLink1URL=http://www.ti.com/lit/ds/symlink/sn74lv4051a-q1.pdf?src-supplier=Digi-Key, ComponentLink2Description=http://www.ti.com/lit/gpn/sn74lv4051a-q1?src-supplier=Mouser, ComponentLink2URL=http://www.ti.com/lit/gpn/sn74lv4051a-q1?src-supplier=Mouser, ComponentLink3Description=https://www.verical.com/server-webapp/html/getDatasheet?partID=137249&src-supplier=Verical, ComponentLink3URL=https://www.verical.com/server-webapp/html/getDatasheet?partID=137249&src-supplier=Verical, ComponentLink4Description=http://focus.ti.com/lit/ds/symlink/sn74lv4051a-q1.pdf?src-supplier=Avnet, ComponentLink4URL=http://focus.ti.com/lit/ds/symlink/sn74lv4051a-q1.pdf?src-supplier=Avnet, ComponentLink5Description=http://www.produktinfo.conrad.com/datenblaetter/1100000-1199999/001187277-da-01-en-IC_MUX_DE_SN74LV4051ATPWRQ1_TSSOP_16_TID.pdf?src-supplier=Conrad, ComponentLink5URL=http://www.produktinfo.conrad.com/datenblaetter/1100000-1199999/001187277-da-01-en-IC_MUX_DE_SN74LV4051ATPWRQ1_TSSOP_16_TID.pdf?src-supplier=Conrad, ComponentLink6Description=https://datasheet.ciiva.com/15127/getdatasheetpartid-348177-15127781.pdf?src-supplier=Verical, ComponentLink6URL=https://datasheet.ciiva.com/15127/getdatasheetpartid-348177-15127781.pdf?src-supplier=Verical, ComponentLink7Description=https://datasheet.ciiva.com/14435/sn74lv4051a-q1-14435640.pdf?src-supplier=Avnet, ComponentLink7URL=https://datasheet.ciiva.com/14435/sn74lv4051a-q1-14435640.pdf?src-supplier=Avnet, ComponentLink8Description=https://datasheet.ciiva.com/29645/sn74lv4051a-q1-29645693.pdf?src-supplier=Digi-Key, ComponentLink8URL=https://datasheet.ciiva.com/29645/sn74lv4051a-q1-29645693.pdf?src-supplier=Digi-Key, ComponentLink9Description=https://datasheet.ciiva.com/29645/sn74lv4051a-q1-29645694.pdf?src-supplier=Digi-Key, ComponentLink9URL=https://datasheet.ciiva.com/29645/sn74lv4051a-q1-29645694.pdf?src-supplier=Digi-Key, ComponentLink10Description=https://datasheet.ciiva.com/29645/sn74lv4051a-q1-29645695.pdf?src-supplier=Digi-Key, ComponentLink10URL=https://datasheet.ciiva.com/29645/sn74lv4051a-q1-29645695.pdf?src-supplier=Digi-Key, Contact Plating=Gold, Lead Free="Lead Free", Logic Function=Multiplexer,Demultiplexer, Low Level Output Current=25mA, Mount="Surface Mount", Number of Bits=8, Number of Channels=1, Number of Circuits=1, Number of Inputs=8, Number of Outputs=1, Number of Pins=16, Packaging="Tape and Reel", Pricing 1="1=0.72000, 10=0.63600, 100=0.48730, 500=0.38522, 1000=0.30818 (USD)", Propagation Delay=7ns, Radiation Hardening=No, REACH SVHC="No SVHC", RoHS=Yes, Stock 1=2492, Supplier 1=Digi-Key, Supply Type=Single, Turn-Off Delay Time=20ns, Turn-On Delay Time=20ns, Weight=0.002169oz
? ? ? ?: "Hex Standoff Threaded #6-32 Aluminum 0.375\" (9.53mm) 3/8\"", Case/Package=Aluminum, Manufacturer=RAF, Manufacturer Part Number=4532-632-AL-7, Package Quantity=100, Supplier Part Number 1=1772-2012-ND, ComponentLink1Description=https://datasheet.ciiva.com/7374/1232651-7374258.pdf?src-supplier=Newark, ComponentLink1URL=https://datasheet.ciiva.com/7374/1232651-7374258.pdf?src-supplier=Newark, ComponentLink2Description=https://datasheet.ciiva.com/5226/4532-632-al-7-198196-5226842.pdf?src-supplier=Mouser, ComponentLink2URL=https://datasheet.ciiva.com/5226/4532-632-al-7-198196-5226842.pdf?src-supplier=Mouser, ComponentLink3Description=https://datasheet.ciiva.com/7921/1232651-7921382.pdf?src-supplier=Element14, ComponentLink3URL=https://datasheet.ciiva.com/7921/1232651-7921382.pdf?src-supplier=Element14, Gender="Male to Female", Length=0.375inch, Material=Aluminium, Mount=Hardware, Packaging=Bulk, Plating=Iridite, Pricing 1="1=0.43000, 25=0.28720, 100=0.24440, 250=0.23220, 500=0.21996, 1000=0.20774 (USD)", REACH SVHC=Unknown, RoHS=Yes, Shape=Hex, Stock 1=6226, Supplier 1=Digi-Key

## Via types
v1: diameter 0.6, hole 0.381, Top Layer to Bottom Layer, tented top, 115 vias
v2: diameter 0.9, hole 0.711, Top Layer to Bottom Layer, tented top, 29 vias

## Nets (pads, with @x,y where several pads share a name; then routed paths per layer and width w, separated by ;. In a path a pad name is that pad's centre, name@x,y a point inside that pad or via, vN(x,y) a via of type N, cw(c..) or ccw(c..) an arc to the next point about the centre after c; other vN are vias at no path point)
+3.3V_AN: 3V3.1 3V3_TEST.1 "POWER IN.1" C5_1.2 C5_2.2 C6_1.2 C6_2.2 C7_1.2 C7_2.2 C8_1.2 C8_2.2 C9_1.2 C9_2.2 C10_1.2 C10_2.2 R1_MUX1.2 R1_MUX2.2 R2_MUX1.2 R2_MUX2.2 R3_MUX1.2 R3_MUX2.2 R4.2 R5.1 R5.2 U1_Mux1.16 U1_Mux2.16 U2_Mux1.16 U2_Mux2.16 U3_Mux1.16 U3_Mux2.16 | length 296.7
  Top Layer w0.75: 3V3.1@139.054,96.795 141.034,98.775 142.95,98.775 144.4,97.325 3V3_TEST.1@144.4,96.825
  Top Layer w1: U1_Mux2.16@79.2,91.677 79.2,95.55 79.632,95.982 92.978,95.982 ; C10_2.2@79.288,61.376 79.2,61.463 93.309,61.463 ; U2_Mux2.16@79.288,75.435 79.288,76.975 79.288,78.902 79.276,78.913 93.309,78.913 ; R3_MUX2.2@81.802,44.637 92.586,44.637 93.309,45.36 93.309,49.225 ; 93.309,55.545 93.309,61.463 ; 3V3_TEST.1@94.5,97.325 93.157,95.982 92.978,95.982 ; 96.8,91.675 93.309,88.184 93.309,78.913 ; U3_Mux1.16 107.357,91.713 107.228,91.842 ; R2_MUX1.2@111.622,85.924 111.622,91.818 111.546,91.894 ; U2_Mux1.16@123.384,86.762 123.384,91.894 ; R1_MUX1.2@127.649,86.037 127.649,91.918 ; R4.2@136.9,96.795 3V3.1@139.054,96.795 ; 138.876,91.918 127.649,91.918 ; U1_Mux1.16@139.03,86.762 139.079,86.811 139.079,93.95 3V3.1@139.079,96.795 ; 92.978,95.982 97.119,91.842 107.228,91.842 ; 93.309,61.463 93.309,78.913 ; 107.228,91.842 107.28,91.894 111.546,91.894 ; 111.546,91.894 123.384,91.894 ; 123.384,91.894 123.408,91.918 127.649,91.918
  Top Layer w1.25: C10_2.2 79.26,61.165 U3_Mux2.16 ; 93.309,53.3 93.309,55.545 ; R5.1@93.325,51.8 93.325,49.241 93.309,49.225 93.334,49.2 v2(126.075,49.2) ; v2(131.925,67.4) 131.925,69.25 134.92,72.245 136.5,72.245 143.72,72.245 144.9,73.425 144.9,91.025 141.975,93.95 139.079,93.95
  Bottom Layer w0.75: v2(126.075,49.2) 131.925,55.05 v2(131.925,67.4)
ADC_OUTA1: "ADC Channel Test CON.5" "INTERBOARD ADC INPUT.1" R1_MUX1.1 U1_Mux1.3 | length 71.2
  Top Layer w0.5: 102.9,65.712 104.186,66.998 104.186,69.611 104.2,69.625 106.75,72.175
  Top Layer w0.75: 106.75,72.175 121.025,72.175 ; v2(118.675,64.025) 120.025,62.675 133.75,62.675 137.212,59.213 139,59.213 ; v2(121,69.6) 121,72.15 121.025,72.175 ; U1_Mux1.3 128.246,84.171 127.649,83.574 127.649,77.449 126.45,76.25 125.05,76.25 121,72.2 121.025,72.175
  Bottom Layer w0.75: v2(118.675,64.025) 118.675,65.475 121.025,67.825 121,67.85 v2(121,69.6)
ADC_OUTA2: "ADC Channel Test CON.3" "INTERBOARD ADC INPUT.6" R1_MUX2.1 U1_Mux2.3 | length 71.5
  Top Layer w0.4: R1_MUX2.1@81.828,80.488 R1_MUX2.1@81.84,80.5
  Top Layer w0.635: R1_MUX2.1@81.828,80.488 v1(89.295,80.488) ; R1_MUX2.1@81.84,80.5 U1_Mux2.3
  Top Layer w0.75: v2(118.625,59.85) 132.05,59.85 136.7,55.2 139,55.2
  Bottom Layer w0.5: v1@89.295,80.386 89.05,80.141 89.05,79.209 96.984,71.275 104.957,71.275 107.98,68.252 ; 108.068,68.163 109.166,67.066 111.039,67.066 111.774,66.331 111.774,66.305 111.789,66.29 111.789,64.511 116.45,59.85 v2(118.625,59.85)
  Bottom Layer w0.75: 108.005,68.453 108.093,68.365
ADC_OUTB1: "ADC Channel Test CON.6" "INTERBOARD ADC INPUT.2" R2_MUX1.1 U2_Mux1.3 | length 59.8
  Top Layer w0.75: 103,68.31 103,70.975 106.55,74.525 v2(111.55,74.525) ; v2(111.45,70.625) 116.175,70.625 122.8,64 134.475,64 137.255,61.22 139,61.22 ; v2@111.65,74.525 111.65,84.175 111.722,84.247 U2_Mux1.3
  Bottom Layer w0.75: v2@111.55,70.95 v2(111.55,74.525)
ADC_OUTB2: "ADC Channel Test CON.4" "INTERBOARD ADC INPUT.3" R2_MUX2.1 U2_Mux2.3 | length 70.4
  Top Layer w0.254: R2_MUX2.1@82.247,63.194 R2_MUX2.1@82.272,63.169
  Top Layer w0.75: R2_MUX2.1@81.853,63.431 v1@91.2,63.431 ; R2_MUX2.1@81.87,63.448 U2_Mux2.3 ; v2(99.45,61.9) 100.1,61.25 133.025,61.25 137.068,57.207 139,57.207
  Bottom Layer w0.75: v1(91.2,63.394) 99.4,63.394 ; v2(99.45,61.9) 99.45,63.344 99.4,63.394 ; 105.513,65.738 103.169,63.394 99.4,63.394
ADC_OUTC1: "ADC Channel Test CON.2" "INTERBOARD ADC INPUT.5" R3_MUX1.1 U3_Mux1.3 | length 70.7
  Top Layer w0.75: U3_Mux1.3 95.137,84.222 95.112,84.196 95.112,68.263 99.55,63.825 106.135,63.825 107.812,65.502 ; v2(118.65,57.95) 132.275,57.95 137.032,53.193 139,53.193
  Bottom Layer w0.75: 108,65.875 108,65.51 108,65.314 115.364,57.95 v2(118.65,57.95)
ADC_OUTC2: "ADC Channel Test CON.1" "INTERBOARD ADC INPUT.4" R3_MUX2.1 U3_Mux2.3 | length 79
  Top Layer w0.381: v1@91.163,46.337 v1(91.175,46.325)
  Top Layer w0.75: R3_MUX2.1@81.802,46.337 v1@91.163,46.337 ; v2(118.7,55.9) 132.325,55.9 137.038,51.187 139,51.187
  Top Layer w1: U3_Mux2.3 81.85,48.725 R3_MUX2.1
  Bottom Layer w0.5: 105.44,68.352 106.75,67.042 106.75,64.05 105.65,62.95 105.559,62.95
  Bottom Layer w0.75: v1(91.175,46.325) 96,46.325 105.559,55.884 ; 105.559,62.95 105.559,55.9 v2(118.7,55.9)
AGND: 3V3.2 "POWER IN.2" ?.1 C5_1.1 C5_2.1 C6_1.1 C6_2.1 C7_1.1 C7_2.1 C8_1.1 C8_2.1 C9_1.1 C9_2.1 C10_1.1 C10_2.1 D1.1 D2_1.1 D3_1.1 D4_1.1 U1_Mux1.6 U1_Mux1.7 U1_Mux1.8 U1_Mux2.6 U1_Mux2.7 U1_Mux2.8 U2_Mux1.6 U2_Mux1.7 U2_Mux1.8 U2_Mux2.6 U2_Mux2.7 U2_Mux2.8 U3_Mux1.6 U3_Mux1.7 U3_Mux1.8 U3_Mux2.6 U3_Mux2.7 U3_Mux2.8 | length 54.4
  Top Layer w0.75: v2@76.087,94.263 v2(76.075,94.275) 76.825,94.275 ; v2(76.25,60.425) 77,60.425 ; v2@76.388,77.762 v2(76.375,77.775) 77,77.775 ; C5_2.1 76.825,94.275 ; C6_2.1 76.85,94.275 76.825,94.275 ; C9_2.1 77,60.425 ; C10_2.1 77,60.425 ; C7_2.1 77,77.775 ; C8_2.1 77.025,77.775 77,77.775 ; U3_Mux2.6 U3_Mux2.7 U3_Mux2.8 v2(89.81,48.775) ; U1_Mux2.6 U1_Mux2.7 U1_Mux2.8 v2(89.85,82.275) ; U2_Mux2.6 U2_Mux2.7 U2_Mux2.8 v2(89.88,66.15) ; v2(98.057,76.212) U3_Mux1.8 U3_Mux1.7 U3_Mux1.6 ; C10_1.1 v2@109.85,88.925 ; C9_1.1@108.95,88.05 C9_1.1 109.775,88.925 v2@109.85,88.925 ; v2(110.225,88.925) v2@109.85,88.925 ; v2(114.059,76.237) U2_Mux1.8 U2_Mux1.7 U2_Mux1.6 ; D2_1.1 125.1,67.5 ; C7_1.1@124.9,88.075 C7_1.1@124.95,88.025 ; C8_1.1 125.788,88.962 ; C7_1.1 125.812,88.962 126.237,88.962 v2(126.25,88.975) ; v2(125,65.725) 125,67.4 125.1,67.5 ; v2(127.525,65.725) 127.525,67.437 127.587,67.5 ; D4_1.1 127.587,67.5 ; v2(129.781,76.161) U1_Mux1.8 U1_Mux1.7 U1_Mux1.6 ; D1.1 137.875,100.025 v2(137.95,99.95) ; C5_1.1@140.625,88.025 C5_1.1 141.375,88.85 ; C6_1.1 141.5,88.975 v2(142.125,88.975) ; 125.1,67.5 D3_1.1 127.587,67.5
NetD1_2: D1.2 R4.1 | length 1.6
  Top Layer w0.75: R4.1@135.35,96.775 D1.2
NetD2_1_2: D2_1.2 R6_1.2 | length 1.5
  Top Layer w0.75: D2_1.2 R6_1.2
NetD2_2_2: 
NetD3_1_2: D3_1.2 R7_1.2 | length 1.5
  Top Layer w0.75: D3_1.2 R7_1.2
NetD3_2_2: 
NetD4_1_2: D4_1.2 R8_1.2 | length 1.5
  Top Layer w0.75: D4_1.2 R8_1.2
NetD4_2_2: 
S0_1: R6_1.1 U1_Mux1.11 U2_Mux1.11 U3_Mux1.11 | length 94.4
  Top Layer w0.5: v1(84.723,99.944) 85.656,99.944 85.675,99.925
  Top Layer w0.508: v1(102.249,80.412) U3_Mux1.11 110.047,80.412 v1(110.123,80.488) ; v1(117.439,80.412) v1(125.617,80.412) ; v1(132.907,80.412) U1_Mux1.11@139.03,80.412
  Top Layer w0.75: R6_1.1 126.075,74.475 131.775,74.475 133.45,76.15 v2(137.625,76.15) ; U1_Mux1.11 140.589,80.361 142.55,78.4 v2(142.55,76.15)
  Bottom Layer w0.4: v1(84.723,99.944) 89.778,99.944 92.547,97.176 92.547,90.115 v1(102.249,80.412) ; v1(110.123,80.488) 117.362,80.488 v1(117.439,80.412)
  Bottom Layer w0.508: v1(125.617,80.412) v1(132.907,80.412)
  Bottom Layer w0.75: v2(137.625,76.15) v2(142.55,76.15)
S0_2: "MUX SEL TP.3" U1_Mux2.11 U2_Mux2.11 U3_Mux2.11 | length 58.2
  Top Layer w0.4: 73.293,103.754 73.293,102.586 74.579,101.3 84.025,101.3 84.625,101.9 85.638,101.9 ; v1(85.638,68.118) v1(85.638,77.161) ; v1(85.638,89.073) v1(85.638,93.391)
  Top Layer w0.5: v1(85.638,97.125) 85.638,101.9
  Top Layer w0.508: U3_Mux2.11@85.638,58.087 v1(85.638,60.244)
  Bottom Layer w0.4: v1(85.638,60.244) v1(85.638,68.118) ; v1(85.638,77.161) v1(85.638,89.073) ; v1(85.638,93.391) 85.689,93.442 85.612,93.518 85.612,96.998 v1@85.739,97.125
S1_1: R7_1.1 U1_Mux1.10 U2_Mux1.10 U3_Mux1.10 | length 86.5
  Top Layer w0.4: 86.975,98.825 v1(88.229,98.825)
  Top Layer w0.5: 86.95,98.85 86.975,98.825
  Top Layer w0.508: v1(102.249,79.142) U3_Mux1.10 110.047,79.142 v1(110.123,79.218) ; v1(117.439,79.142) v1(125.617,79.142) ; v1(132.907,79.142) U1_Mux1.10@139.03,79.142
  Top Layer w0.75: R7_1.1 127.65,73.475 132.55,73.475 133.825,74.75 v2(137.9,74.75) ; U1_Mux1.10 140.159,79.091 141.175,78.075 141.175,74.725 v2(141.225,74.675)
  Bottom Layer w0.4: v1(88.229,98.825) 89.881,98.825 91.785,96.922 91.785,89.607 v1(102.249,79.142) ; v1(110.123,79.218) 117.362,79.218 v1(117.439,79.142)
  Bottom Layer w0.508: v1(125.617,79.142) v1(132.907,79.142)
  Bottom Layer w0.75: v2(137.9,74.75) 137.975,74.675 v2(141.225,74.675)
S1_2: "MUX SEL CON.2" "MUX SEL TP.2" U1_Mux2.10 U2_Mux2.10 U3_Mux2.10 | length 56.7
  Top Layer w0.4: 75.833,103.754 75.833,103.069 76.502,102.4 84.25,102.4 84.792,102.942 86.197,102.942 86.933,102.205 86.933,101.595 ; v1(86.908,68.118) v1(86.908,77.161) ; v1(86.908,89.073) v1(86.908,93.391)
  Top Layer w0.5: v1(86.933,97.125) 86.933,101.595
  Top Layer w0.508: U3_Mux2.10@86.908,58.087 v1(86.908,60.244)
  Bottom Layer w0.4: v1(86.908,60.244) v1(86.908,68.118) ; v1(86.908,77.161) v1(86.908,89.073) ; v1(86.908,93.391) 86.908,97.074 v1@86.959,97.125
S2_1: R8_1.1 U1_Mux1.9 U2_Mux1.9 U3_Mux1.9 | length 82.1
  Top Layer w0.5: 89.194,101.621 89.854,101.621 90.134,101.341
  Top Layer w0.508: v1(89.753,97.125) 90.134,97.506 90.134,101.341 ; v1(102.249,77.872) U3_Mux1.9 110.047,77.872 v1(110.123,77.948) ; v1(117.439,77.872) v1(125.617,77.872) ; v1(132.907,77.872) U1_Mux1.9@139.03,77.872
  Top Layer w0.65: R8_1.1 132.825,72.2 134.3,73.675 138.825,73.675 139.475,74.325 139.475,77.821 U1_Mux1.9
  Bottom Layer w0.4: v1(89.753,97.125) 89.753,90.369 v1(102.249,77.872) ; v1(110.123,77.948) 117.362,77.948 v1(117.439,77.872)
  Bottom Layer w0.508: v1(125.617,77.872) v1(132.907,77.872)
S2_2: "MUX SEL TP.1" U1_Mux2.9 U2_Mux2.9 U3_Mux2.9 | length 56.4
  Top Layer w0.4: 78.373,103.754 v1(81.04,103.754) ; v1(85.739,103.78) 85.765,103.754 87.619,103.754 88.229,103.145 88.229,101.875 ; v1(88.178,68.118) v1(88.178,77.161) ; v1(88.178,89.073) v1(88.178,93.391)
  Top Layer w0.508: U3_Mux2.9@88.178,58.087 v1(88.178,60.244) ; v1(88.229,97.125) 89.194,98.09 89.194,101.621 88.483,101.621 88.229,101.875
  Bottom Layer w0.4: v1(88.178,60.244) v1(88.178,68.118) ; v1(88.178,77.161) v1(88.178,89.073) ; v1(88.178,93.391) 88.178,97.074 v1(88.229,97.125)
  Bottom Layer w0.508: v1(81.04,103.754) 81.066,103.78 v1(85.739,103.78)
TS_IN1_1: "THERMISTOR CON 2.1" U1_Mux1.13 | length 35.7
  Top Layer w0.254: 117.921,101.672 131.053,101.672 134.125,98.6 v1@134.125,97.65 ; v1@134.558,90.597 136.565,88.591 136.565,84.095 137.708,82.952 U1_Mux1.13@139.03,82.952
  Bottom Layer w0.254: v1(134.163,97.425) 134.163,90.955 v1@134.52,90.597
  other v1: 134.558,90.572
TS_IN1_2: "THERMISTOR CON 1.1" U1_Mux2.13 | length 23.2
  Top Layer w0.254: 64.937,81.402 65.089,81.402 66.689,83.003 v1(67.553,83.003) ; v1(70.118,83.079) 74.995,87.956 80.863,87.956 83.098,90.191 U1_Mux2.13@83.098,91.59
  Bottom Layer w0.254: v1(67.553,83.003) 70.042,83.003 v1(70.118,83.079)
TS_IN2_1: "THERMISTOR CON 2.2" U1_Mux1.14 | length 37
  Top Layer w0.254: 117.921,103.653 131.967,103.653 v1(133.974,101.646) ; v1(136.082,90.572) 137.606,89.048 137.606,84.679 138.013,84.273 138.98,84.273 U1_Mux1.14@139.03,84.222
  Bottom Layer w0.254: v1(133.974,101.646) 136.082,99.538 v1(136.082,90.572)
TS_IN2_2: "THERMISTOR CON 1.2" U1_Mux2.14 | length 23.8
  Top Layer w0.254: 62.956,81.402 65.699,84.146 v1(67.553,84.146) v1@67.604,84.146 ; v1@70.195,84.273 74.69,88.768 80.228,88.768 81.828,90.369 U1_Mux2.14@81.828,91.59
  Bottom Layer w0.254: v1@67.604,84.146 70.068,84.146 v1@70.195,84.273
  other v1: 70.118,84.273
TS_IN3_1: "THERMISTOR CON 2.3" U1_Mux1.15 | length 41.2
  Top Layer w0.254: 115.915,101.672 115.915,101.164 117.337,99.741 129.707,99.741 130.24,99.741 131.891,98.09 131.891,96.998 134.99,93.899 v1(137.276,93.899) ; U1_Mux1.15@139.03,85.492 140.807,85.492 143.448,88.133 143.65,88.335 v1(143.65,88.725)
  Bottom Layer w0.254: v1(137.276,93.899) 140.07,93.899 143.448,90.521 143.65,90.319 v1(143.65,88.725)
TS_IN3_2: "THERMISTOR CON 1.3" U1_Mux2.15 | length 22.6
  Top Layer w0.254: 64.937,79.396 65.165,79.624 66.486,79.624 68.925,82.063 68.925,84.247 74.259,89.581 79.618,89.581 80.558,90.521 U1_Mux2.15@80.558,91.59
TS_IN4_1: "THERMISTOR CON 2.4" U1_Mux1.12 | length 40.2
  Top Layer w0.254: 115.915,103.653 116.931,102.637 116.931,101.214 117.566,100.579 130.671,100.579 133.125,98.125 v1(133.125,97.4) ; v1(133.491,90.572) 135.498,88.565 135.498,83.333 137.149,81.682 U1_Mux1.12@139.03,81.682
  Bottom Layer w0.254: v1(133.125,97.4) 133.3,97.225 133.3,90.916 v1@133.491,90.724
TS_IN4_2: "THERMISTOR CON 1.4" U1_Mux2.12 | length 27.6
  Top Layer w0.254: 62.956,79.396 63.133,79.396 64.038,80.3 65.765,80.3 67.375,81.91 v1@67.502,81.91 ; v1@70.017,81.885 75.122,86.99 81.65,86.99 84.368,89.708 U1_Mux2.12@84.368,91.59
  Bottom Layer w0.254: v1@67.502,81.91 v1(67.553,81.91) 69.991,81.91 v1@70.017,81.885
  other v1: 70.118,81.885
TS_IN5_1: "THERMISTOR CON 2.5" U1_Mux1.1 | length 28.5
  Top Layer w0.254: 113.908,101.672 116.88,98.7 128.945,98.7 129.58,98.065 v1(129.58,93.798)
  Top Layer w1: v1(129.707,89.581) 129.707,86.785 U1_Mux1.1@129.73,86.762
  Bottom Layer w0.254: v1@129.58,89.708 v1(129.58,93.798)
  Bottom Layer w0.508: v1@129.58,89.708 v1(129.707,89.581)
TS_IN5_2: "THERMISTOR CON 1.5" U1_Mux2.1 | length 16.6
  Top Layer w0.254: 64.937,77.389 65.151,77.175 73.562,77.175 78.676,82.29 U1_Mux2.1@79.288,82.29
TS_IN6_1: "THERMISTOR CON 2.6" U1_Mux1.5 | length 41.6
  Top Layer w0.254: v1(112.943,100.3) 112.943,102.484 113.908,103.45 113.908,103.653 ; U1_Mux1.5@129.73,81.682 131.155,81.682 133.542,84.069 133.542,89.353 v1@132.501,90.394
  Bottom Layer w0.254: v1(112.943,100.3) 114.391,98.852 123.738,98.852 125.821,96.769 131.002,96.769 132.501,95.271 v1(132.501,90.572)
TS_IN6_2: "THERMISTOR CON 1.6" U1_Mux2.5 | length 27.7
  Top Layer w0.254: 62.956,77.389 63.791,78.225 66.052,78.225 67.883,80.056 70.626,80.056 76.697,86.127 82.31,86.127 84.368,84.069 U1_Mux2.5@84.368,82.29
TS_IN7_1: "THERMISTOR CON 2.7" U1_Mux1.2 | length 35.4
  Top Layer w0.254: 111.901,101.672 111.901,99.995 114.137,97.76 v1(127.878,97.76) ; U1_Mux1.2 130.901,85.441 131.586,86.127 131.586,89.073 130.621,90.038 v1@130.621,90.572 ; v1(130.443,97.811) 130.596,97.658 130.596,93.874 130.621,93.848 v1(130.621,93.747)
  Bottom Layer w0.254: v1(127.878,97.76) v1@130.443,97.76 ; v1(130.545,90.572) 130.545,93.671 v1(130.621,93.747)
TS_IN7_2: "THERMISTOR CON 1.7" U1_Mux2.2 | length 22.5
  Top Layer w0.254: 64.937,75.383 64.988,75.332 v1(67.07,75.332) ; v1(67.502,78.202) 67.756,78.456 73.039,78.456 78.805,84.222 80.278,84.222 80.558,83.942 U1_Mux2.2@80.558,82.29
  Bottom Layer w0.254: v1(67.07,75.332) 67.07,77.77 v1(67.502,78.202)
TS_IN8_1: "THERMISTOR CON 2.8" U1_Mux1.4 | length 41.1
  Top Layer w0.254: 111.901,103.653 111.901,103.373 110.936,102.408 110.936,99.817 113.883,96.871 126.1,96.871 v1(127.497,95.474) ; U1_Mux1.4 131.053,82.901 132.475,84.323 132.475,89.251 131.51,90.216 v1@131.51,90.419
  Bottom Layer w0.254: v1(127.497,95.474) 131.053,95.474 131.561,94.966 131.561,90.623 v1(131.51,90.572)
TS_IN8_2: "THERMISTOR CON 1.8" U1_Mux2.4 | length 28.2
  Top Layer w0.254: 62.956,75.383 63.848,76.275 68.349,76.275 68.549,76.075 v1(68.75,76.075) ; v1(69.15,79.225) 71.625,79.225 77.425,85.025 82.325,85.025 83.11,84.24 U1_Mux2.4
  Bottom Layer w0.254: v1(68.75,76.075) 68.75,78.825 v1(69.15,79.225)
TS_IN9_1: "THERMISTOR CON 2.9" U2_Mux1.13 | length 28.3
  Top Layer w0.254: 109.895,101.672 109.895,99.36 v1(112.105,97.15) ; v1@119.775,90.699 119.775,85.365 122.138,83.003 123.333,83.003 U2_Mux1.13@123.384,82.952
  Bottom Layer w0.254: v1(112.105,97.15) 117.947,97.15 119.852,95.245 v1@119.852,90.877
  other v1: 119.775,90.724
TS_IN9_2: "THERMISTOR CON 1.9" U2_Mux2.13 | length 20.5
  Top Layer w0.254: 64.937,73.376 65.14,73.173 v1(74.538,73.173) ; v1(83.098,73.401) U2_Mux2.13@83.098,75.435